# EAGLE board NovaBlinky-RevA (EAGLE 6.4)
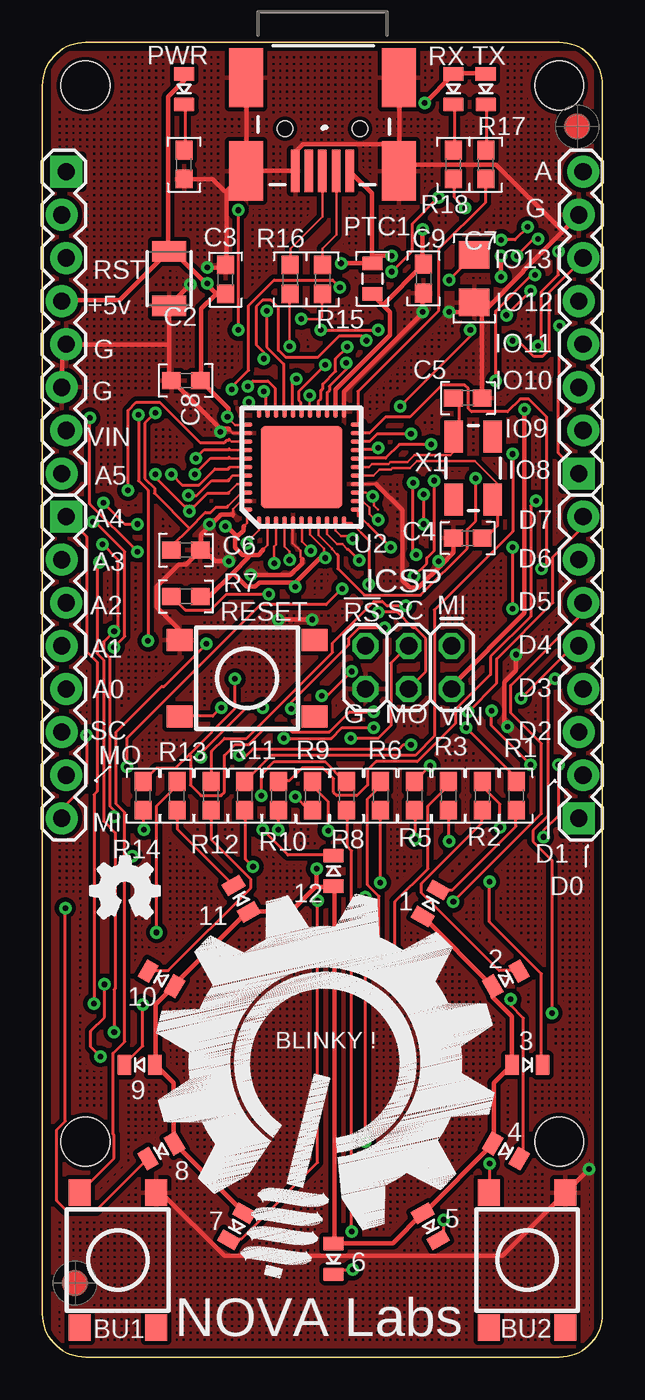
[diagram p0: board, top side]
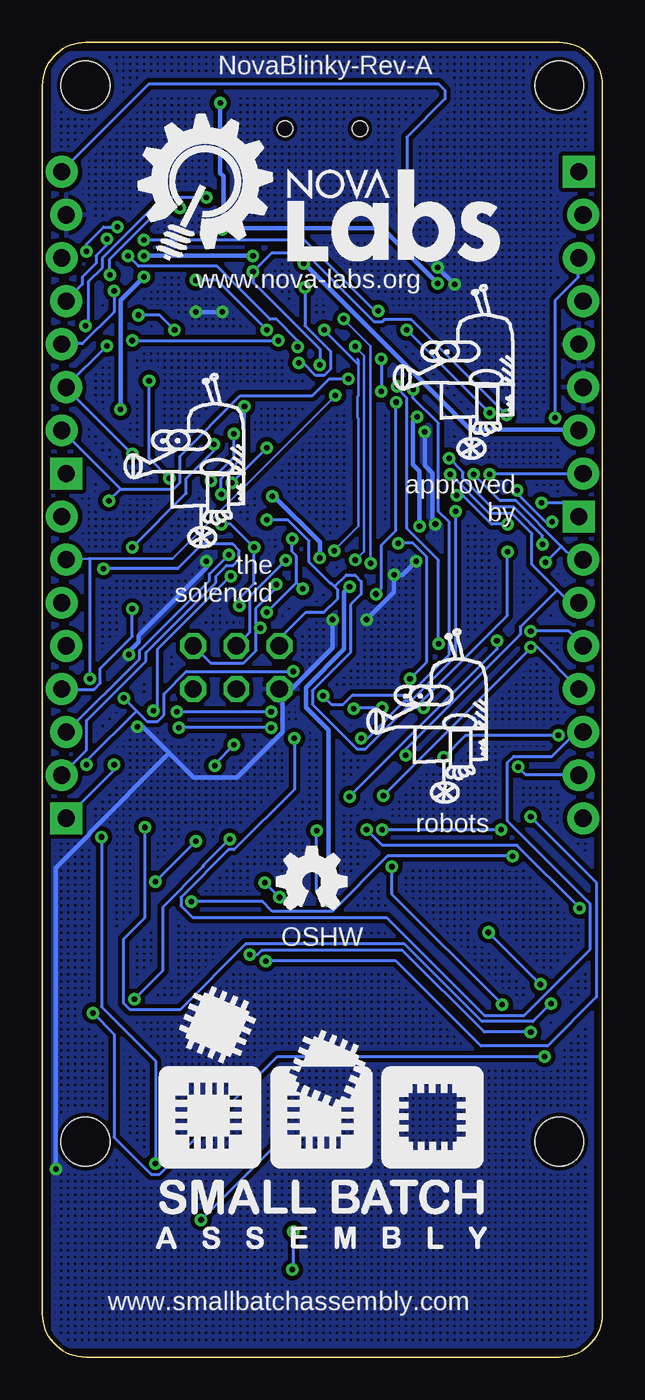
[diagram p1: board, bottom side, seen from below]

Size 33.02 x 77.47 mm. Coordinates in mm from the lower left corner, seen from the top.
Outline: 30.48,77.47 2.54,77.47 arc90 0,74.93 0,2.54 arc90 2.54,0 30.48,0 arc90 33.02,2.54 33.02,74.93 arc90 30.48,77.47
Copper layers (1*16): Top 0.035mm / dielectric 1.5mm / Bottom 0.035mm
Design rules "default *": minimum track width 6mil, minimum drill 13mil, track to track 6mil, track to pad 6mil, pad to pad 6mil, via to via 6mil, smd to smd 0mil, copper to edge 6mil, drill to drill 6mil, minimum pad ring 9mil, minimum via ring 8mil, stop-mask expansion 0mil, vias tented up to drill 20mil, thermal gap 10mil
Net classes: 0 default: width 0.178 mm; 1 pwrgnd: width 0.254 mm

## Footprints (pad centres in the part's own frame; a part is rotated, then mirrored left to right if it is on the bottom)
LED-0805 = smd 1.2 x 0.8: A 0,-0.9; C 0,0.9
TACTILE_SWITCH_TALL = smd 1.55 x 1.3: A1 -3.975,-2.25; A2 3.975,-2.25; B1 -3.975,2.25; B2 3.975,2.25
1210 = smd 1.2 x 2: 1 -1.6,0; 2 1.6,0
0603 = smd 1.1 x 1: 1 0.85,0; 2 -0.85,0
1206 = smd 1.6 x 1.8: 1 -1.4,0; 2 1.4,0
2X3 = drill 1.016 octagon: 1 0,0; 2 0,2.54; 3 2.54,0; 4 2.54,2.54; 5 5.08,0; 6 5.08,2.54
USB-MINIB = smd 2.5 x 0.5: D+ 2.5,0; D- 2.5,0.8; GND 2.5,-1.6; ID 2.5,-0.8; VBUS 2.5,1.6 | smd 3.5 x 2: GND@1 -3,-4.5; GND@2 -3,4.5; GND@3 2.5,4.5; GND@4 2.5,-4.5 | hole 0.9: 0,2.2; 0,-2.2
HOLE112 = hole 2.857: 0,0
1X08_LOCK = drill 1.016 pad 1.88 square: 1 0,0.127 | drill 1.016 pad 1.88: 2 2.54,-0.127; 3 5.08,0.127; 4 7.62,-0.127; 5 10.16,0.127; 6 12.7,-0.127; 7 15.24,0.127; 8 17.78,-0.127
0805 = smd 0.8 x 1.2: 1 -0.9,0; 2 0.9,0
QFN44ML7X7_V2 = smd 0.75 x 0.275: 1 -3.275,2.5; 2 -3.275,2; 3 -3.275,1.5; 4 -3.275,1; 5 -3.275,0.5; 6 -3.275,0; 7 -3.275,-0.5; 8 -3.275,-1; 9 -3.275,-1.5; 10 -3.275,-2; 11 -3.275,-2.5; 23 3.275,-2.5; 24 3.275,-2; 25 3.275,-1.5; 26 3.275,-1; 27 3.275,-0.5; 28 3.275,0; 29 3.275,0.5; 30 3.275,1; 31 3.275,1.5; 32 3.275,2; 33 3.275,2.5 | smd 0.275 x 0.75: 12 -2.5,-3.275; 13 -2,-3.275; 14 -1.5,-3.275; 15 -1,-3.275; 16 -0.5,-3.275; 17 0,-3.275; 18 0.5,-3.275; 19 1,-3.275; 20 1.5,-3.275; 21 2,-3.275; 22 2.5,-3.275; 34 2.5,3.275; 35 2,3.275; 36 1.5,3.275; 37 1,3.275; 38 0.5,3.275; 39 0,3.275; 40 -0.5,3.275; 41 -1,3.275; 42 -1.5,3.275; 43 -2,3.275; 44 -2.5,3.275 | smd 4.826 x 4.826: EXP 0,0
CRYSTAL-SMD-5X3 = smd 1.9 x 1.1: 1 -1.85,-1.15; 2 1.85,-1.15; 3 1.85,1.15; 4 -1.85,1.15

## Placement (x,y rotation side)
1  [LED-0805]  22.88,26.74 330 top
2  [LED-0805]  27.32,22.3 300 top
3  [LED-0805]  28.59,17.22 270 top
4  [LED-0805]  27.32,12.14 240 top
5  [LED-0805]  22.88,7.69 210 top
6  [LED-0805]  17.16,5.79 180 top
7  [LED-0805]  11.45,7.69 150 top
8  [LED-0805]  7,12.14 120 top
9  [LED-0805]  5.73,17.22 90 top
10  [LED-0805]  7,22.3 60 top
11  [LED-0805]  11.72,27.01 30 top
12  [LED-0805]  17.16,28.65 0 top
BU1  SWITCH-MOMENTARY-2SMD-4  [TACTILE_SWITCH_TALL]  4.45,5.71 90 top
BU2  SWITCH-MOMENTARY-2SMD-4  [TACTILE_SWITCH_TALL]  28.58,5.71 90 top
C2  10uf  [1210]  7.46,63.55 270 top
C3  0.1uF  [0603]  10.79,63.5 270 top
C4  18pF  [0603]  25.08,48.26 0 top
C5  18pF  [0603]  25.08,56.51 180 top
C6  0.1uF  [0603]  8.46,47.55 180 top
C7  1uf  [1206]  25.46,63.55 270 top
C8  0.1uF  [0603]  8.46,57.55 0 top
C9  0.1uF  [0603]  22.46,63.55 90 top
FID1  [FIDUCIAL_G15]  31.53,72.51 270 top
FID2  [FIDUCIAL_G15]  1.92,4.36 270 top
ICSP  ISP  [2X3]  24.13,41.91 180 top
J1  USB-MINIB-MOLEX-67503-1020  [USB-MINIB]  16.51,72.39 270 top
JP1  MTGHOLE110MIL  [HOLE112]  2.54,74.93 270 top
JP2  MTGHOLE110MIL  [HOLE112]  30.48,12.7 270 top
JP3  MTGHOLE110MIL  [HOLE112]  30.48,74.93 270 top
JP4  MTGHOLE110MIL  [HOLE112]  2.54,12.7 270 top
JP6  [1X08_LOCK]  1.27,49.53 270 top
JP7  PINHD8  [1X08_LOCK]  31.75,52.07 90 top
JP8  PINHD8  [1X08_LOCK]  31.75,31.75 90 top
JP9  [1X08_LOCK]  1.27,69.85 270 top
PTC1  .250ma  [0805]  19.46,63.55 270 top
PWR  GREEN  [LED-0805]  8.35,74.72 180 top
R1  1k  [0603]  27.93,33.07 90 top
R2  1k  [0603]  25.93,33.07 90 top
R3  1k  [0603]  23.93,33.07 90 top
R4  1K  [0603]  8.35,70.27 270 top
R5  1k  [0603]  21.93,33.07 90 top
R6  1k  [0603]  19.93,33.07 90 top
R7  10K  [0603]  8.46,44.82 180 top
R8  1k  [0603]  17.93,33.07 90 top
R9  1k  [0603]  15.93,33.07 270 top
R10  1k  [0603]  13.93,33.07 90 top
R11  1k  [0603]  11.93,33.07 90 top
R12  1k  [0603]  9.93,33.07 90 top
R13  1k  [0603]  7.93,33.07 90 top
R14  1k  [0603]  5.93,33.07 90 top
R15  22  [0603]  16.51,63.5 90 top
R16  22  [0603]  14.61,63.5 90 top
R17  1K  [0603]  26.13,70.27 270 top
R18  1K  [0603]  24.23,70.27 270 top
RESET  SWITCH-MOMENTARY-2SMD-4  [TACTILE_SWITCH_TALL]  12.06,40 180 top
RXLED  [LED-0805]  24.23,74.72 180 top
TXLED  [LED-0805]  26.13,74.72 180 top
U2  ATMEGA32U4  [QFN44ML7X7_V2]  15.27,52.44 90 top
U$1  SMALLBATCH_LOGO750W  [SMALLBATCH_750W]  26.36,6.38 0 bottom
U$2  SOLENOID_ROBOT  [SOLENOID_ROBT_450MIL]  28.31,47.45 0 bottom
U$3  OSHWLOGO150  [OSHW150_NO_TEXT]  2.77,25.77 0 top
U$4  SOLENOID_ROBOT  [SOLENOID_ROBT_450MIL]  14,32.41 0 bottom
U$5  OSHWLOGO150  [OSHW150_NO_TEXT]  19.24,26.31 0 bottom
U$6  [NOVA-LABS-LOGO-LARGE]  16.53,16.58 12.6 top
U$7  SOLENOID_ROBOT  [SOLENOID_ROBT_450MIL]  12.43,52.69 0 bottom
X1  16mhz  [CRYSTAL-SMD-5X3]  25.4,52.39 270 top
X2  [NOVA-LABS-LOGO-FULL-SMALL]  27.42,64.55 0 bottom

## Library data of the parts
1-12 C2-C9 FID1 FID2 J1 JP1-JP4 PTC1 PWR R1-R18 RXLED TXLED U$1-U$5 U$7 X1 = _cogwheel
BU1 BU2 RESET = SparkFun-Electromechanical
ICSP = SparkFun
JP6-JP9 = SparkFun-Connectors
U2 = atmega32u4
U$6 X2 = NOVA-LABS-LOGO

## Nets
+5V [pwrgnd]: 1.A 2.A 3.A 4.A 5.A 6.A 7.A 8.A 9.A 10.A 11.A 12.A C2.1 C3.1 C8.1 C9.1 JP9.4 PTC1.2 PWR.A R7.2 RXLED.A TXLED.A U2.2 U2.7 U2.14 U2.24 U2.34 U2.44
A0: JP6.5 R8.1 U2.36
A1: JP6.4 R6.1 U2.37
A2: JP6.3 R5.1 U2.38
A3: JP6.2 R3.1 U2.39
A4: JP6.1 R2.1 U2.40
A5: JP9.8 R1.1 U2.41
AREF: C6.1 JP7.8 U2.42
D0/RX: JP8.1 U2.20
D1/TX: JP8.2 U2.21
D2/SDA: JP8.3 U2.19
D3/SCL: JP8.4 U2.18
D4: BU2.B2 JP8.5 U2.25
D5: BU1.B2 JP8.6 U2.31
D6: JP8.7 R13.1 U2.27
D7: JP8.8 R14.1 U2.1
GND [pwrgnd]: BU1.A2 BU2.A2 C2.2 C3.2 C4.2 C5.2 C6.2 C7.2 C8.2 C9.2 ICSP.6 J1.GND J1.GND@1 J1.GND@2 J1.GND@3 J1.GND@4 JP7.7 JP9.5 JP9.6 R4.1 RESET.A2 U2.5 U2.15 U2.23 U2.35 U2.43
HWB: R7.1 U2.33
IO8: JP7.1 R9.1 U2.28
IO9: JP7.2 R10.1 U2.29
IO10: JP7.3 R11.1 U2.30
IO11: JP7.4 R12.1 U2.12
IO12: JP7.5 U2.26
IO13: JP7.6 U2.32
MISO: ICSP.1 JP6.8 U2.11
MOSI: ICSP.4 JP6.7 U2.10
N$1: PWR.C R4.2
N$3: R17.2 TXLED.C
N$4: R18.2 RXLED.C
N$7: 1.C R1.2
N$11: 2.C R2.2
N$12: 3.C R3.2
N$13: 4.C R5.2
N$14: 5.C R6.2
N$15: 6.C R8.2
N$16: 7.C R9.2
N$17: 8.C R10.2
N$18: 9.C R11.2
N$19: 10.C R12.2
N$20: 11.C R13.2
N$21: 12.C R14.2
PAD: U2.EXP
PB0/RXLED: R18.1 U2.8
PD5/TXLED: R17.1 U2.22
RST: ICSP.5 JP9.3 RESET.B2 U2.13
SCK: ICSP.3 JP6.6 U2.9
UCAP: C7.1 U2.6
USBM: R15.2 U2.3
USBP: R16.2 U2.4
USBXM: J1.D- R15.1
USBXP: J1.D+ R16.1
VIN [pwrgnd]: ICSP.2 J1.VBUS JP9.7 PTC1.1
X1: C5.1 U2.17 X1.1
X2: C4.1 U2.16 X1.3

## Tracks (layer width: path | path; a pad name or v marks a point on that pad's centre or on a via)
+5V  (via drill 0.33)
  Top 0.152: 15.77,49.14 U2.7 15.77,48.47 16.61,47.63 16.61,47.29 16.62,47.27 | 13.28,49.14 U2.2 13.27,47.86 13,47.59 | 12.01,49.95 12.06,49.95 12.06,49.9 12.06,49.15 11.87,48.97 | 11.99,55.02 11.94,54.96 11.99,54.91 | 11.99,54.91 U2.34 | U2.14 19.08,50.94 19.39,50.63 19.55,50.47 19.55,50.19 19.78,49.95 | 11.99,54.91 11.37,54.91 11,55.28
  Top 0.254: 1.A 22.48,25.9 26.54,21.84 2.A 26.54,21.71 26.54,21.21 27.67,20.09 27.67,17.34 3.A 27.67,17.21 26.6,16.15 26.6,12.59 4.A 26.54,12.52 22.54,8.52 5.A 22.42,8.46 20.67,6.71 17.17,6.71 6.A 17.23,6.84 17.23,27.65 12.A 17.1,27.71 16.17,27.71 | 16.17,27.71 16.1,27.71 14.67,26.27 12.23,26.27 11.A 12.04,26.21 7.79,21.96 10.A 7.73,21.84 6.67,20.77 6.67,17.27 9.A 6.73,17.15 7.73,16.15 7.73,12.59 8.A 7.85,12.52 11.85,8.52 7.A | TXLED.A 26.1,75.65 24.29,75.65 RXLED.A 24.17,75.52 v22.54,73.9 | 20.07,61.99 19.48,62.59 PTC1.2 | 20.07,61.99 20.48,61.59 20.48,60.21 17.29,57.02 17.29,55.77 U2.24 | 20.07,61.99 22.42,64.34 C9.1 22.42,64.46 v22.42,66.46 | v19.48,50.71 19.39,50.63 | 16.62,47.27 16.67,47.21 v16.67,47.09 16.35,47.09 14.92,45.65 | 12.06,49.9 12.04,49.9 U2.44 | 11.48,48.34 11.35,48.21 11.35,47.71 11.79,47.27 12.17,47.27 | 11.48,48.34 11.85,48.71 11.85,48.9 11.87,48.97 | 12.17,47.27 12.73,47.27 12.98,47.52 13,47.59 | 11.23,46.21 12.17,47.15 12.17,47.27 | 11.23,46.21 9.85,44.84 9.35,44.84 R7.2 | 14.92,45.65 12.79,45.65 12.54,45.4 12.04,45.4 11.23,46.21 | 10.98,55.4 10.98,55.9 9.35,57.52 C8.1 9.35,57.65 9.35,61.77 10.17,62.59 10.17,62.71 | 10.98,55.4 10.98,55.34 11,55.28 | 10.17,62.71 10.79,62.71 C3.1 | 9.67,63.21 7.79,65.09 7.48,65.09 C2.1 | 9.67,63.21 10.17,62.71 | PWR.A 8.35,75.59 8.35,75.21 7.42,74.27 7.42,65.21 C2.1 | JP9.4 1.17,62.27 4.54,62.27 7.35,65.09 C2.1 | 11.48,48.34 10.85,48.96 v10.79,48.96 | v10.92,55.4 10.98,55.4 | v9.73,63.27 9.67,63.21 | v16.17,28.77 16.17,27.71 | v14.92,45.4 14.92,45.65
  Bottom 0.254: v22.54,73.9 22.54,69.77 22.35,69.59 22.35,66.52 v22.42,66.46 22.23,66.52 12.98,66.52 v9.73,63.27 | v19.48,50.71 19.35,50.71 16.67,48.02 v16.67,47.09 | v10.79,48.96 10.79,52.21 11.17,52.59 11.17,55.15 v10.92,55.4 | v16.17,28.77 16.17,36.96 17.48,38.27 17.48,39.46 15.23,41.71 15.23,45.09 v14.92,45.4
A0  (via drill 0.33)
  Top 0.152: U2.36 11.15,53.94 11.02,54.07 11,54.09
  Top 0.178: v5.04,51.09 5.04,55.77 5.54,56.27 6.92,56.27 9.29,53.9 10.73,53.9 10.85,54.02 10.98,54.02 11.02,54.07 | v2.98,49.21 3.1,49.21 4.85,47.46 4.85,42.46 v4.23,41.84 | v12.92,33.09 12.92,34.34 13.67,35.09 16.67,35.09 17.79,33.96 17.92,33.96 R8.1
  Bottom 0.178: v5.04,51.09 5.04,50.9 3.35,49.21 v2.98,49.21 | JP6.5 1.42,39.4 3.85,41.84 v4.23,41.84 4.23,41.77 v12.92,33.09
A1  (via drill 0.33)
  Top 0.152: U2.37 11.09,53.44 11.02,53.51 11,53.53
  Top 0.178: v9.04,52.96 9.54,53.46 10.98,53.46 11.02,53.51 | v3.54,47.9 4.48,46.96 4.48,43.02 v4.23,42.77 3.6,42.15 3.6,41.59 3.98,41.21 3.98,32.46 4.23,32.21 v4.23,31.84 | v19.85,23.34 19.85,27.15 19.17,27.84 19.17,32.9 19.92,33.65 19.92,33.9 R6.1
  Bottom 0.178: v9.04,52.96 8.23,52.15 8.23,51.77 6.54,50.09 5.23,50.09 3.54,48.4 v3.54,47.9 | v4.23,42.77 1.98,42.77 1.17,41.96 JP6.4 | v19.85,23.34 12.17,23.34 7.17,18.34 3.23,18.34 0.35,21.21 0.35,27.96 v4.23,31.84
A2  (via drill 0.33)
  Top 0.152: U2.38 11.09,52.94 11.02,53.01 11,53.03
  Top 0.178: v8.98,52.02 9.92,52.96 10.98,52.96 11.02,53.01 | v22.85,34.84 21.98,33.96 R5.1 | v21.73,36.09 21.29,36.09 21.04,35.84 12.42,35.84 12.04,35.46 v11.6,35.46
  Bottom 0.178: v8.98,52.02 6.67,49.71 5.35,49.71 4.17,48.52 4.17,46.71 2.67,45.21 | 2.67,45.21 1.92,44.46 1.42,44.46 JP6.3 | v22.85,34.84 22.85,34.96 v21.73,36.09 | v11.6,35.46 11.6,35.84 4.85,42.59 4.85,43.02 2.67,45.21
A3  (via drill 0.33)
  Top 0.152: U2.39 11.03,52.44 11,52.41
  Top 0.178: v7.6,52.02 8.23,51.4 9.23,51.4 10.17,52.34 10.98,52.34 11,52.41 | v20.79,23.71 20.79,26.84 22.73,28.77 22.73,32.46 23.92,33.65 23.92,33.9 R3.1 | v4.23,19.15 4.23,21.65 4.29,21.71 4.29,30.9 3.6,31.59 3.6,41.09 3.23,41.46 3.23,46.71 v3.35,46.84
  Bottom 0.178: v7.6,52.02 6.04,50.46 5.1,50.46 2.42,47.77 | 2.42,47.77 1.67,47.02 1.17,47.02 JP6.2 | v20.79,23.71 20.35,23.71 20.1,23.96 11.79,23.96 6.98,19.15 v4.23,19.15 | 2.42,47.77 v3.35,46.84
A4  (via drill 0.33)
  Top 0.152: U2.40 11.22,51.94 11,51.72
  Top 0.178: v8.6,50.77 9.1,50.77 9.98,51.65 10.98,51.65 11,51.72 | v5.6,49.09 4.85,49.09 v3.6,50.34 | v26.98,31.21 26.98,32.59 25.98,33.59 25.98,33.9 R2.1 | v3.04,20.84 3.04,33.15 3.23,33.34 3.23,40.96 2.6,41.59 2.6,48.34 1.42,49.52 JP6.1
  Bottom 0.178: v8.6,50.77 8.23,50.77 6.54,49.09 v5.6,49.09 | v3.6,50.34 2.17,50.34 1.42,49.59 JP6.1 | v26.98,31.21 26.98,25.9 28.23,24.65 28.23,20.84 27.85,20.46 24.92,20.46 21.04,24.34 11.67,24.34 7.1,19.77 4.1,19.77 v3.04,20.84
A5  (via drill 0.33)
  Top 0.152: U2.41 11.47,51.44 11,50.97
  Top 0.178: 8.67,50.15 8.35,50.15 6.67,51.84 v6.67,52.02 | 8.67,50.15 8.98,50.15 9.73,50.9 10.98,50.9 11,50.97 | v24.98,37.09 27.92,34.15 27.92,33.96 R1.1 | v19.54,37.09 17.67,37.09 17.04,36.46 v14.23,36.46 | 8.67,50.15 v8.67,49.84
  Bottom 0.178: v6.67,52.02 1.17,52.02 JP9.8 | v19.54,37.09 v24.98,37.09 | v14.23,36.46 13.85,36.46 11.67,38.65 11.29,38.65 8.67,41.27 v8.67,49.84
AREF  (via drill 0.33)
  Top 0.152: 11.96,50.92 U2.42 11.91,50.92 11.7,50.92 10.94,50.16
  Top 0.178: 8.67,48.84 7.67,47.84 7.67,47.59 C6.1 | 8.67,48.84 9.6,49.77 9.92,49.77 10.23,50.09 10.92,50.09 10.94,50.16 | 8.67,48.84 6.6,50.9 6.6,51.21 6.04,51.77 6.04,55.02 v6.67,55.65 | v11.54,67.59 v11.54,60.52
  Bottom 0.178: v11.54,60.52 v6.67,55.65 | v11.54,67.59 11.54,71.9 9.29,74.15 9.29,74.65 9.67,75.02 26.73,75.02 31.85,69.9 JP7.8
D0/RX  (via drill 0.33)
  Top 0.178: v21.73,54.4 19.73,54.4 19.29,53.96 18.6,53.96 U2.20 | v23.1,51.65 23.1,47.52 22.67,47.09 22.67,46.77 v21.92,46.02 | v26.48,38.09 26.48,37.21 v28.79,34.9
  Bottom 0.178: v21.73,54.4 21.73,53.02 v23.1,51.65 | v21.92,46.02 26.23,41.71 26.23,38.34 v26.48,38.09 | v28.79,34.9 28.79,34.59 31.6,31.77 JP8.1
D1/TX  (via drill 0.33)
  Top 0.178: v29.42,46.46 29.73,46.77 29.73,55.4 28.67,56.46 28.17,56.46 27.42,55.71 25.29,55.71 25.1,55.9 25.1,57.09 24.92,57.27 23.54,57.27 21.67,55.4 20.23,55.4 19.29,54.46 18.6,54.46 U2.21
  Bottom 0.178: v29.42,46.46 25.04,46.46 23.6,47.9 21.79,47.9 21.42,47.52 21.42,47.02 21.79,46.65 22.17,46.65 22.79,46.02 22.79,45.65 26.92,41.52 26.92,41.02 30.42,37.52 30.42,35.77 31.85,34.34 JP8.2
D2/SDA  (via drill 0.33)
  Top 0.152: 18.59,53.44 U2.19
  Top 0.178: v19.79,53.59 19.67,53.46 18.67,53.46 U2.19 | v21.85,51.52 21.85,47.46 v22.04,47.27
  Bottom 0.178: v21.85,51.52 v19.79,53.59 | v22.04,47.27 23.17,46.15 23.17,45.77 27.29,41.65 27.29,41.15 31.6,36.84 JP8.3
D3/SCL  (via drill 0.33)
  Top 0.152: U2.18 18.58,52.94 18.59,52.93
  Top 0.178: v22.92,53.77 21.04,53.77 20.23,52.96 18.67,52.96 U2.18 | v27.73,44.09 v27.73,47.71
  Bottom 0.178: v22.92,53.77 22.92,53.4 24.54,51.77 24.54,50.9 v27.73,47.71 | v27.73,44.09 27.73,42.46 29.6,40.59 29.6,39.71 29.98,39.34 31.85,39.34 JP8.4
D4  (via drill 0.33)
  Top 0.178: v17.92,58.59 17.92,58.21 16.92,57.21 16.92,56.96 16.79,56.84 16.79,55.77 U2.25 | v17.54,63.02 17.1,63.46 13.67,63.46 12.17,61.96 12.17,58.15 11.17,57.15 v11.17,57.02 | v16.48,38.96 16.79,38.96 v18.23,40.4 | v28.23,38.84 31.29,41.9 31.6,41.9 JP8.5 | v26.35,11.4 26.35,9.71 BU2.B2 | v29.54,30.65 29.54,31.02 30.42,31.9 v30.42,34.9
  Bottom 0.178: v17.92,58.59 17.67,58.59 16.92,57.84 16.42,57.84 16.04,58.21 16.04,59.27 17.54,60.77 v17.54,63.02 | v11.17,57.02 11.17,56.52 9.67,55.02 9.67,49.84 9.04,49.21 9.04,41.4 11.42,39.02 14.73,39.02 15.29,38.46 15.98,38.46 v16.48,38.96 | v18.23,40.4 24.54,40.4 25.85,39.09 25.85,37.84 26.23,37.46 26.85,37.46 27.48,38.09 | v28.23,38.84 27.48,38.09 | v26.35,11.4 26.35,17.46 29.54,20.65 v29.54,30.65 | v30.42,34.9 30.42,35.15 27.48,38.09
D5  (via drill 0.33)
  Top 0.152: U2.31 13.82,55.68
  Top 0.178: v12.1,57.21 12.42,57.52 13.29,57.52 13.73,57.09 13.73,55.77 U2.31 | v9.67,42.02 7.17,39.52 7.04,39.52 4.35,36.84 4.35,32.59 4.85,32.09 4.85,29.52 | 4.85,29.52 4.85,18.59 4.17,17.9 4.17,13.15 4.23,13.09 4.23,11.71 2.23,9.71 BU1.B2 | v24.23,26.84 29.42,32.02 29.42,36.15 27.6,37.96 27.6,39.59 31.85,43.84 31.85,44.4 JP8.6 | 4.85,29.52 v5.29,29.52
  Bottom 0.178: v12.1,57.21 12.1,57.09 11.54,56.52 11.54,48.84 9.67,46.96 v9.67,42.02 | v24.23,26.84 20.04,26.84 19.48,26.27 15.92,26.27 12.67,29.52 v5.29,29.52
D6  (via drill 0.33)
  Top 0.152: v15.75,56.67 15.75,55.75 U2.27
  Top 0.178: v6.73,25.02 6.73,32.46 7.92,33.65 7.92,33.9 R13.1 | v3.67,21.96 3.67,20.02 2.85,19.21 2.85,18.27 v3.42,17.71 | v30.04,20.27 30.04,29.27 28.92,30.4 28.92,31.02 29.79,31.9 29.79,39.52 v30.23,39.96
  Bottom 0.152: v15.75,56.67 25.35,47.07 30.23,47.07 30.3,47.07 JP8.7
  Bottom 0.178: v3.67,21.96 v6.73,25.02 | v3.42,17.71 19.17,17.71 26.1,10.77 26.6,10.77 28.79,12.96 28.79,19.02 v30.04,20.27 | 30.23,47.07 v30.23,39.96
D7  (via drill 0.33)
  Top 0.152: U2.1 12.77,49.14 12.77,48.74 12.02,47.99 12,47.97
  Top 0.178: v11.35,39.96 11.35,38.21 8.67,35.52 | 8.67,35.52 7.85,34.71 6.73,34.71 5.98,33.96 R14.1 | v12.04,47.96 12.02,47.99 | v25.1,38.02 26.79,39.71 26.79,41.15 30.1,44.46 30.1,47.15 31.85,48.9 31.85,49.52 JP8.8 | v19.54,38.02 18.1,38.02 16.92,36.84 14.73,36.84 14.48,37.09 13.17,37.09 12.17,36.09 11.35,36.09 10.73,35.46 10.73,33.27 10.54,33.09 9.35,33.09 8.73,33.71 8.73,35.46 8.67,35.52
  Bottom 0.178: v12.04,47.96 11.17,47.96 10.35,47.15 10.35,40.96 v11.35,39.96 | v19.54,38.02 v25.1,38.02
GND  (via drill 0.33)
  Top 0.152: 14.75,49.14 U2.5 14.76,49.12 14.76,47.98 15.21,47.52 15.21,47.14 15.34,47.01 15.37,46.99 | 11.96,50.46 U2.43 | U2.43 11.72,50.44 | 11.99,54.46 U2.35 11.22,54.44 11,54.66 | 19.68,51.43 18.41,51.43 U2.15 | U2.43 11.75,50.47 11.25,49.97 11.25,49.65 11.25,49.53
  Top 0.254: U2.23 17.79,55.77 17.79,56.9 22.42,61.52 v22.42,61.59 22.42,62.65 C9.2 | C5.2 25.92,56.52 25.92,61.65 25.48,62.09 C7.2 | 30.67,66.34 31.6,67.27 JP7.7 | 30.67,66.34 28.35,64.02 28.35,63.96 26.04,61.65 C7.2 | v23.98,61.59 25.79,61.59 C7.2 | JP9.6 1.17,57.15 1.17,59.46 1.35,59.65 JP9.5 1.48,59.65 7.48,59.65 | 10.48,54.71 10.98,54.71 11,54.66 | 10.48,54.71 7.67,57.52 C8.2 7.54,57.65 7.48,57.71 7.48,59.65 | 7.48,59.65 7.48,61.9 C2.2 7.54,62.02 v8.73,63.21 | J1.GND@3 21.04,69.9 21.04,75.34 J1.GND@2 | 10.85,68.71 10.85,64.4 C3.2 10.73,64.27 10.67,64.21 v9.73,64.21 | 10.85,68.71 11.98,69.84 J1.GND@4 | R4.1 8.42,69.4 10.04,69.4 10.73,68.71 10.85,68.71 | J1.GND@4 12.1,69.9 14.85,69.9 J1.GND 14.85,70.02 14.85,70.96 15.35,71.46 20.92,71.46 J1.GND@3 | J1.GND@1 12.04,75.34 12.04,69.96 J1.GND@4 | 30.67,66.34 26.73,70.27 21.17,70.27 J1.GND@3 | BU1.A2 6.73,9.65 7.04,9.65 10.73,5.96 27.1,5.96 30.79,9.65 BU2.A2 30.92,9.77 v32.23,11.09 | 23.54,46.71 24.23,47.4 24.23,48.21 C4.2 | 23.54,46.71 22.17,45.34 21.67,45.34 21.23,45.77 21.23,49.9 19.73,51.4 19.68,51.43 | 11.25,49.65 10.54,49.65 9.92,49.02 | 9.92,49.02 9.35,48.46 9.35,47.59 C6.2 | v12.29,46.09 14.6,46.09 15.29,46.77 15.29,46.96 15.34,47.01 | v10.98,46.9 10.17,46.9 9.48,47.59 C6.2 | RESET.A2 8.04,42.27 8.04,42.9 6.73,44.21 6.73,45.4 8.04,46.71 8.48,46.71 9.23,47.46 C6.2 | v13.92,43.46 v15.92,43.46 | v23.35,46.9 23.54,46.71 | v27.92,41.4 27.92,40.46 27.23,39.77 27.23,37.34 v27.42,37.15 | v10.48,54.52 10.48,54.71 | v9.85,49.09 9.92,49.02
  Bottom 0.254: v23.98,61.59 v22.42,61.59 | v9.73,64.21 v8.73,63.21 | v10.98,46.9 11.79,46.09 v12.29,46.09 12.29,45.09 v13.92,43.46 | v15.92,43.46 15.92,41.77 18.29,39.4 19.04,39.4 ICSP.6 18.85,39.27 18.85,36.84 21.54,34.15 24.1,34.15 25.54,35.59 | v23.35,46.9 23.35,46.52 27.35,42.52 27.35,42.15 27.92,41.59 v27.92,41.4 | v27.42,37.15 27.1,37.15 25.54,35.59 | v32.23,11.09 32.23,28.84 30.23,30.84 30.23,30.9 25.54,35.59 | v10.48,54.52 10.48,52.52 10.04,52.09 10.04,49.27 v9.85,49.09
  pour Top (isolate 0.254, hatched): 32.39,76.83 0.64,76.83 0.64,0.63 32.39,0.63
  pour Bottom (isolate 0.254, hatched): 0.64,76.83 32.39,76.83 32.39,0.63 0.64,0.63
HWB  (via drill 0.33)
  Top 0.152: U2.33 12.75,55.73
  Top 0.178: v12.17,56.27 12.23,56.27 12.73,55.77 U2.33 | v13.35,44.96 10.85,44.96 9.92,44.02 8.42,44.02 7.67,44.77 R7.1
  Bottom 0.178: v12.17,56.27 12.17,48.71 13.04,47.84 13.04,45.27 v13.35,44.96
IO8  (via drill 0.33)
  Top 0.178: v16.67,58.46 15.1,56.9 15.1,56.4 15.23,56.27 15.23,55.77 U2.28 | v20.6,63.96 21.79,65.15 21.79,66.77 v23.35,68.34 | v30.48,60.77 30.48,57.71 30.42,57.65 30.42,53.27 31.6,52.09 JP7.1 | v14.92,33.02 15.67,32.27 15.92,32.27 R9.1 | v6.23,42.21 6.23,51.09 5.67,51.65 v5.67,55.52
  Bottom 0.178: v16.67,58.46 16.67,59.4 20.6,63.34 v20.6,63.96 19.48,65.09 17.35,65.09 16.98,64.71 16.98,64.52 13.48,61.02 12.98,61.02 12.85,61.15 11.29,61.15 v5.67,55.52 | v23.35,68.34 25.92,68.34 29.48,64.77 29.48,64.21 30.29,63.4 30.29,60.96 v30.48,60.77 | v14.92,33.02 6.23,41.71 v6.23,42.21
IO9  (via drill 0.33)
  Top 0.178: v14.98,57.65 14.73,57.4 14.73,55.77 U2.29 | v29.1,50.46 28.79,50.15 28.79,43.65 26.42,41.27 26.42,40.21 24.35,38.15 24.35,37.34 22.1,35.09 19.67,35.09 19.17,34.59 19.17,33.71 18.54,33.09 17.35,33.09 17.17,33.27 17.17,34.09 16.54,34.71 15.29,34.71 14.54,33.96 13.98,33.96 R10.1
  Bottom 0.178: v14.98,57.65 16.1,57.65 17.1,56.65 21.35,56.65 24.92,53.09 24.92,51.52 25.29,51.15 28.42,51.15 | 28.42,51.15 31.85,54.59 JP7.2 | 28.42,51.15 v29.1,50.46
IO10  (via drill 0.33)
  Top 0.178: v13.23,61.65 13.23,59.52 14.23,58.52 14.23,55.77 U2.30 | v27.04,65.84 27.85,65.84 v28.6,66.59 | v30.42,65.15 30.42,63.77 29.42,62.77 29.42,59.77 v29.23,59.59 | v27.73,53.21 27.73,48.65 23.1,44.02 23.1,36.59 21.98,35.46 13.48,35.46 11.98,33.96 R11.1
  Bottom 0.178: v13.23,61.65 13.42,61.65 17.6,65.84 v27.04,65.84 | v28.6,66.59 29.42,66.59 30.42,65.59 v30.42,65.15 | v29.23,59.59 31.6,57.21 JP7.3 31.6,57.09 v27.73,53.21
IO11  (via drill 0.33)
  Top 0.152: U2.12 18.6,49.87 18.6,49.57 18.7,49.57 19.2,49.07
  Top 0.178: v20.54,47.71 19.23,49.02 19.2,49.07 | v21.42,44.27 20.29,44.27 20.04,44.52 19.54,44.52 17.1,42.09 17.1,41.52 12.04,36.46 10.73,36.46 9.98,35.71 9.98,33.96 R12.1 | v27.35,61.4 v28.79,62.84 | v25.23,60.52 25.23,60.15 v21.1,56.02 | v22.48,49.09 v22.48,50.84
  Bottom 0.178: v21.42,44.27 21.42,44.71 20.54,45.59 v20.54,47.71 21.92,49.09 v22.48,49.09 | v28.79,62.84 28.79,61.59 30.67,59.71 31.85,59.71 JP7.4 | v27.35,61.4 26.1,61.4 v25.23,60.52 | v21.1,56.02 21.1,53.15 22.48,51.77 v22.48,50.84
IO12  (via drill 0.33)
  Top 0.178: v29.23,65.9 28.98,65.9 v27.98,64.9 | v17.98,59.52 17.29,58.84 17.29,58.09 16.54,57.34 16.54,57.09 16.42,56.96 16.42,56.46 16.29,56.34 16.29,55.77 U2.26
  Bottom 0.178: v29.23,65.9 29.23,65.52 29.85,64.9 29.85,64.46 30.67,63.65 30.67,63.21 31.6,62.27 JP7.5 | v27.98,64.9 27.35,64.27 22.73,64.27 19.6,61.15 19.23,61.15 17.98,59.9 v17.98,59.52
IO13  (via drill 0.33)
  Top 0.152: U2.32 13.22,55.72 13.21,55.73
  Top 0.178: v13.04,56.9 13.17,56.77 13.17,55.77 U2.32 | v13.04,58.84 13.04,59.21 12.6,59.65 12.6,61.9 12.98,62.27 13.48,62.27 13.92,61.84 13.92,59.34 14.35,58.9 16.23,58.9 17.48,60.15 18.85,60.15 v19.1,59.9 | v27.73,59.9 28.04,59.9 28.98,58.96 29.48,58.96 29.85,59.34 29.85,62.71 31.85,64.71 JP7.6
  Bottom 0.178: v13.04,58.84 v13.04,56.9 | v27.73,59.9 v19.1,59.9
MISO  (via drill 0.33)
  Top 0.152: U2.11 17.8,49.14 18.23,49.14 18.8,48.57
  Top 0.178: v19.23,45.52 19.29,45.59 19.29,48.09 18.85,48.52 18.8,48.57 | v2.6,36.65 2.6,33.77 1.17,32.34 1.17,31.77 JP6.8 | v9.35,35.34 9.35,35.59 12.04,38.27 v12.98,38.27 | v14.67,38.21 14.67,38.59 18.04,41.96 18.04,42.34 18.67,42.96 v20.17,42.96
  Bottom 0.178: v19.23,45.52 19.23,45.34 20.42,44.15 20.42,42.96 | 20.42,42.96 20.42,41.65 21.17,40.9 23.1,40.9 24.1,41.9 ICSP.1 | v2.6,36.65 8.04,36.65 v9.35,35.34 | v12.98,38.27 14.6,38.27 v14.67,38.21 | 20.42,42.96 v20.17,42.96
MOSI  (via drill 0.33)
  Top 0.152: U2.10 17.27,48.7 17.6,48.37 18.2,48.37 18.3,48.27
  Top 0.178: v19.79,43.9 20.92,43.9 21.85,42.96 21.98,42.96 22.6,42.34 22.6,40.4 21.6,39.4 ICSP.4 | v18.29,48.21 18.3,48.27 | v4.98,34.77 4.98,36.46 12.85,44.34 16.73,44.34 v17.67,45.27
  Bottom 0.178: v18.29,48.21 18.29,47.46 18.04,47.21 18.04,45.65 | v19.79,43.9 18.04,45.65 | v4.98,34.77 4.54,34.34 1.42,34.34 JP6.7 | 18.04,45.65 v17.67,45.27
N$1
  Top 0.178: R4.2 8.42,71.15 8.42,73.77 PWR.C
N$3
  Top 0.178: R17.2 26.17,71.15 26.17,73.77 TXLED.C
N$4
  Top 0.178: R18.2 24.29,71.15 24.29,73.77 RXLED.C
N$7
  Top 0.178: R1.2 27.92,32.21 27.92,31.27 24.17,27.52 23.35,27.52 1.C
N$11
  Top 0.178: R2.2 25.92,32.21 25.92,31.46 22.35,27.9 22.35,27.34 26.92,22.77 28.04,22.77 2.C
N$12  (via drill 0.33)
  Top 0.178: v23.98,30.4 23.98,32.21 R3.2 | v26.35,28.02 26.35,25.65 29.42,22.59 29.42,17.34 29.48,17.27 3.C
  Bottom 0.178: v26.35,28.02 v23.98,30.4
N$13  (via drill 0.33)
  Top 0.178: v21.98,30.52 21.98,32.21 R5.2 | v27.6,21.09 27.6,20.71 28.35,19.96 28.35,11.96 28.1,11.71 4.C
  Bottom 0.178: v21.98,30.52 23.54,28.96 23.54,28.9 25.92,26.52 25.92,22.77 v27.6,21.09
N$14  (via drill 0.33)
  Top 0.178: v19.92,27.96 19.92,32.21 R6.2 | v19.04,12.71 v19.04,27.09 | v23.67,8.09 23.67,7.27 23.35,6.96 5.C
  Bottom 0.178: v19.04,27.09 v19.92,27.96 | v23.67,8.09 v19.04,12.71
N$15  (via drill 0.33)
  Top 0.178: v18.23,7.4 18.23,29.84 17.98,30.09 17.98,32.21 R8.2 | v18.29,5.15 17.42,5.15 6.C
  Bottom 0.178: v18.23,7.4 18.23,5.21 v18.29,5.15
N$16  (via drill 0.33)
  Top 0.178: v16.85,31.02 16.85,32.71 15.98,33.59 15.98,33.9 R9.2 | v16.23,26.9 16.23,11.46 11.73,6.96 11.04,6.96 7.C
  Bottom 0.178: v16.85,31.02 16.85,27.52 v16.23,26.9
N$17  (via drill 0.33)
  Top 0.178: v13.92,31.09 13.92,32.21 R10.2 | v1.35,26.46 1.35,13.9 0.85,13.4 0.85,9.21 1.42,8.65 3.17,8.65 6.17,11.65 8.C
  Bottom 0.178: v13.92,31.09 12.98,30.15 5.04,30.15 v1.35,26.46
N$18  (via drill 0.33)
  Top 0.178: v12.42,28.9 11.98,29.34 11.98,32.21 R11.2 | v5.92,20.77 5.92,18.34 4.85,17.27 9.C
  Bottom 0.178: v12.42,28.9 12.42,27.27 v5.92,20.77
N$19
  Top 0.178: R12.2 9.98,32.21 9.98,30.46 12.29,28.15 12.29,27.65 7.42,22.77 6.23,22.77 10.C
N$20
  Top 0.178: R13.2 7.98,32.21 7.98,31.09 11.23,27.84 11.C
N$21  (via drill 0.33)
  Top 0.178: v5.98,31.09 5.98,32.21 R14.2 | v12.98,31.09 14.48,29.59 17.1,29.59 12.C
  Bottom 0.178: v12.98,31.09 v5.98,31.09
PB0/RXLED  (via drill 0.33)
  Top 0.152: 16.27,49.14 U2.8 16.27,48.44 17.06,47.64 17.06,47.61 17.37,47.29
  Top 0.178: v24.92,67.71 24.29,68.34 24.29,69.4 R18.1 | v29.04,63.77 28.85,63.77 26.73,61.65 v26.73,57.52 | v25.54,51.77 25.54,49.27 25.04,48.77 25.04,47.65 22.29,44.9 18.98,44.9 17.42,46.46 17.42,47.27 17.37,47.29
  Bottom 0.178: v24.92,67.71 26.04,67.71 29.04,64.71 v29.04,63.77 | v26.73,57.52 26.73,52.96 v25.54,51.77
PD5/TXLED
  Top 0.178: U2.22 18.6,54.96 18.6,56.9 23.35,61.65 23.35,65.27 26.1,68.02 26.1,69.4 R17.1
RST  (via drill 0.33)
  Top 0.152: U2.13 18.57,50.42 18.91,50.42 19.27,50.06 19.27,49.68 19.51,49.44
  Top 0.178: v19.79,49.34 19.73,49.4 19.54,49.4 19.51,49.44 | v10.54,38.27 10.04,37.77 8.1,37.77 RESET.B2 | v2.79,55.34 2.79,50.27 v5.6,47.46
  Bottom 0.178: v19.79,49.34 18.54,49.34 17.29,48.09 17.29,46.84 16.04,45.59 15.98,45.59 15.79,45.4 | 15.79,45.4 15.6,45.21 15.6,44.71 16.42,43.9 17.48,43.9 19.04,42.34 19.04,41.96 ICSP.5 | 10.98,38.27 11.54,38.27 13.98,35.84 14.48,35.84 17.1,38.46 17.1,39.27 14.85,41.52 14.85,44.34 14.23,44.96 14.23,45.71 14.6,46.09 15.1,46.09 15.79,45.4 | 10.98,38.27 v10.54,38.27 | v2.79,55.34 2.79,62.27 1.42,63.65 1.42,64.71 JP9.3 | v5.6,47.46 5.6,43.71 10.98,38.34 10.98,38.27
SCK  (via drill 0.33)
  Top 0.152: 16.78,49.14 U2.9 16.77,48.51 17.37,47.9 17.68,47.9 17.98,47.6
  Top 0.178: v18.67,46.96 18.04,47.59 17.98,47.6 | v18.17,36.46 19.79,36.46 20.54,37.21 20.54,40.9 21.54,41.9 ICSP.3
  Bottom 0.178: v18.67,46.96 20.79,44.84 20.79,42.71 21.54,41.96 ICSP.3 | v18.17,36.46 18.17,33.46 21.73,29.9 22.04,29.9 24.85,27.09 24.85,26.59 24.17,25.9 12.73,25.9 6.98,20.15 4.6,20.15 0.73,24.02 0.73,26.71 5.6,31.59 5.6,35.02 5.23,35.4 2.98,35.4 1.6,36.77 1.17,36.77 JP6.6
UCAP  (via drill 0.33)
  Top 0.152: 15.26,49.14 U2.6 15.29,49.12 15.29,48.06 v15.82,47.52 15.9,47.45
  Top 0.178: v23.98,63.46 25.42,64.9 C7.1 | v16.42,60.52 v19.79,60.52
  Bottom 0.152: v15.82,47.52 14.38,48.97 14.38,55.29 14.45,55.37 14.45,56.59 14.38,56.67 14.38,58.52 14.38,58.72 14.45,58.8
  Bottom 0.178: v23.98,63.46 22.73,63.46 v19.79,60.52 | v16.42,60.52 14.42,58.52 14.38,58.52
USBM  (via drill 0.33)
  Top 0.152: v13.67,46.77 13.67,47.77 13.77,47.87 U2.3 | v15.27,61.17 16.37,61.17 16.47,61.27 16.47,62.57 R15.2
  Bottom 0.152: 15.27,61.27 v15.27,61.17 13.68,59.58 | 13.67,59.57 13.68,59.58 | 13.68,59.58 13.69,59.56 13.69,46.84 v13.67,46.77
USBP  (via drill 0.33)
  Top 0.152: v14.57,46.97 14.57,47.47 14.27,47.77 U2.4 | v14.57,59.57 14.57,62.57 R16.2
  Bottom 0.152: 14.57,46.87 v14.57,46.97 14.07,47.47 14.07,56.47 14.07,56.51 14.07,59.03 14.45,59.41 v14.57,59.57 14.47,59.47
USBXM
  Top 0.152: J1.D- 17.32,69.85 17.32,66.14 16.51,65.33 16.51,64.36 R15.1
USBXP
  Top 0.152: J1.D+ 16.51,67.21 14.63,65.33 14.63,64.36 R16.1
VIN  (via drill 0.33)
  Top 0.254: 19.42,64.9 19.42,68.59 18.17,69.84 J1.VBUS | 19.42,64.9 19.42,64.46 PTC1.1 19.29,64.46 v17.6,64.46 | v28.42,55.84 28.42,43.84 24.17,39.59 24.17,39.4 ICSP.2 | v27.04,64.9 v27.04,63.65 | 19.42,64.9 v20.6,64.9
  Bottom 0.254: v28.42,55.84 28.42,62.27 v27.04,63.65 | v20.6,64.9 v27.04,64.9 | v17.6,64.46 7.79,54.65 1.42,54.65 JP9.7
X1
  Top 0.152: 24.52,54.2 X1.1 | U2.17 18.56,52.44 19.25,52.44 19.42,52.62 20.39,52.62 20.52,52.75 21.53,52.75 21.94,53.15 24.06,53.15 24.46,53.55
  Top 0.178: C5.1 24.59,56.76 24.59,54.27 X1.1 24.48,54.15 24.48,53.59 24.46,53.55
X2
  Top 0.152: U2.16 18.56,51.93 19.53,51.93 19.88,52.29 20.54,52.29 20.64,52.39 21.66,52.39 22.07,52.8 25.5,52.8 26.88,51.43 26.88,50.56 X1.3
  Top 0.178: C4.1 26.37,47.92 26.37,48.53 26.83,48.99 26.83,50.46 X1.3

## Text on the board
bPlace: NovaBlinky-Rev-A | www.nova-labs.org | approved / by | the / solenoid | robots | OSHW | www.smallbatchassembly.com
tNames: RX | TX | A | G | RST | IO13 | +5v | IO12 | G | IO11 | IO10 | G | VIN | IO9 | A5 | IO8 | A4 | D7 | D6 | A3 | A2 | SC | D5 | !RS | MI | D4 | A1 | A0 | D3 | G | MO | VIN | SC | D2 | MO | MI | D1 | 12 | D0 | 11 | 1 | 2 | 10 | BLINKY ! | 3 | 9 | 4 | 8 | 7 | 5 | 6 | NOVA Labs